# EAGLE board nfr24l_module2 (EAGLE 6.5.0)
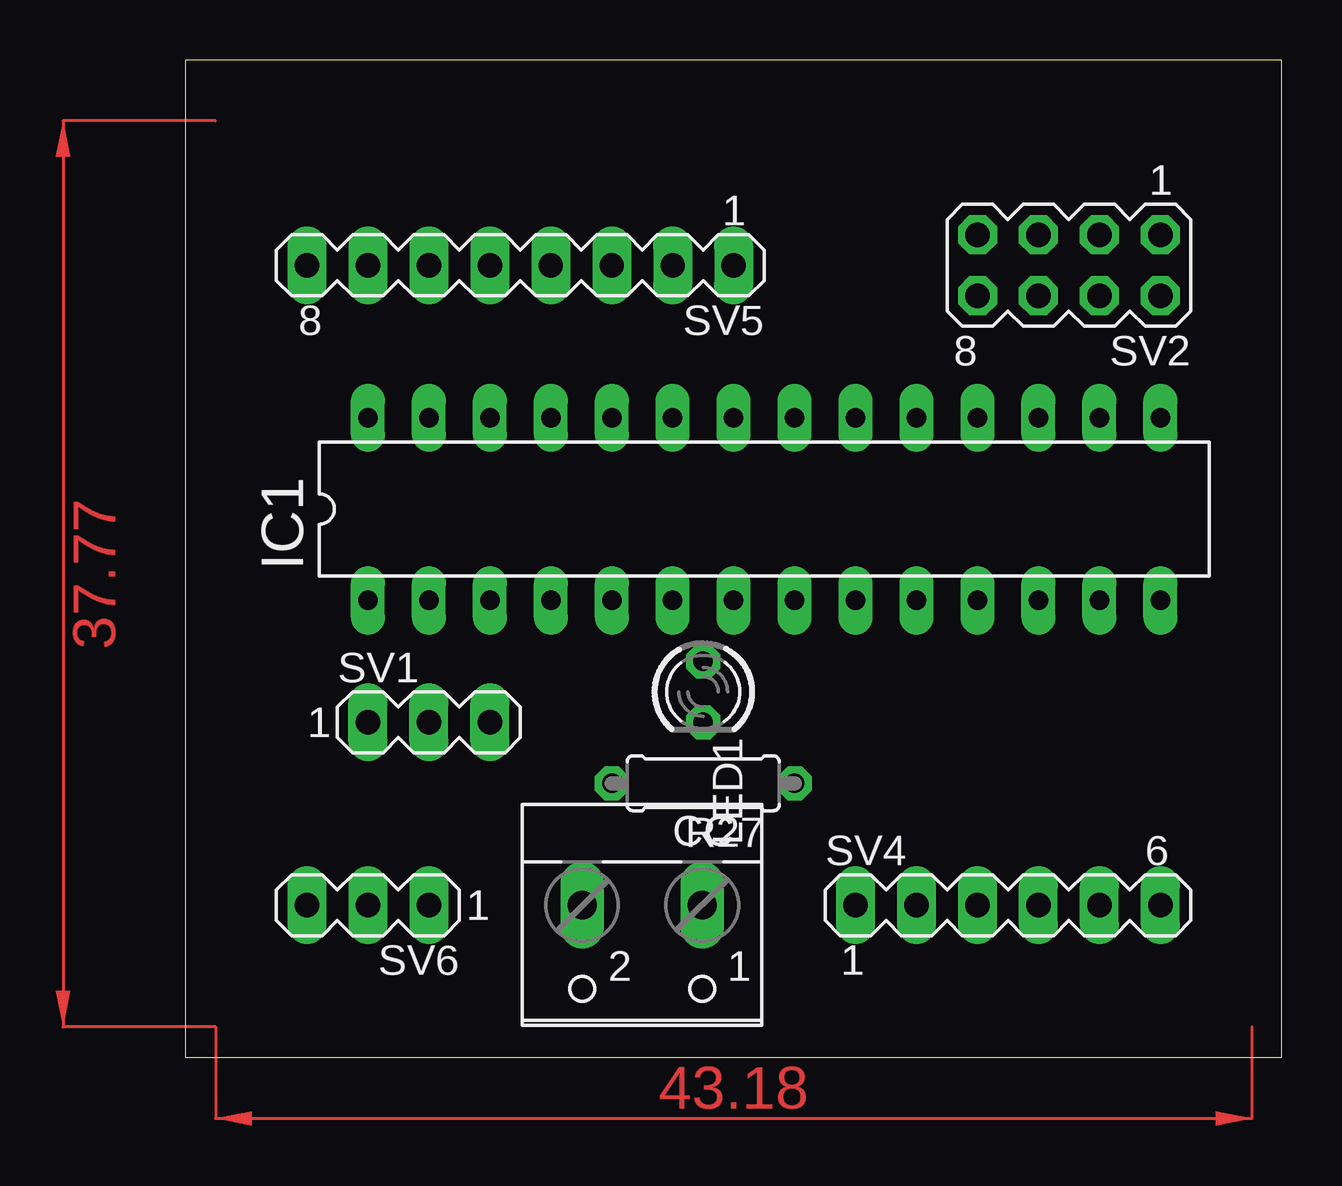
[diagram p0: board, top side]
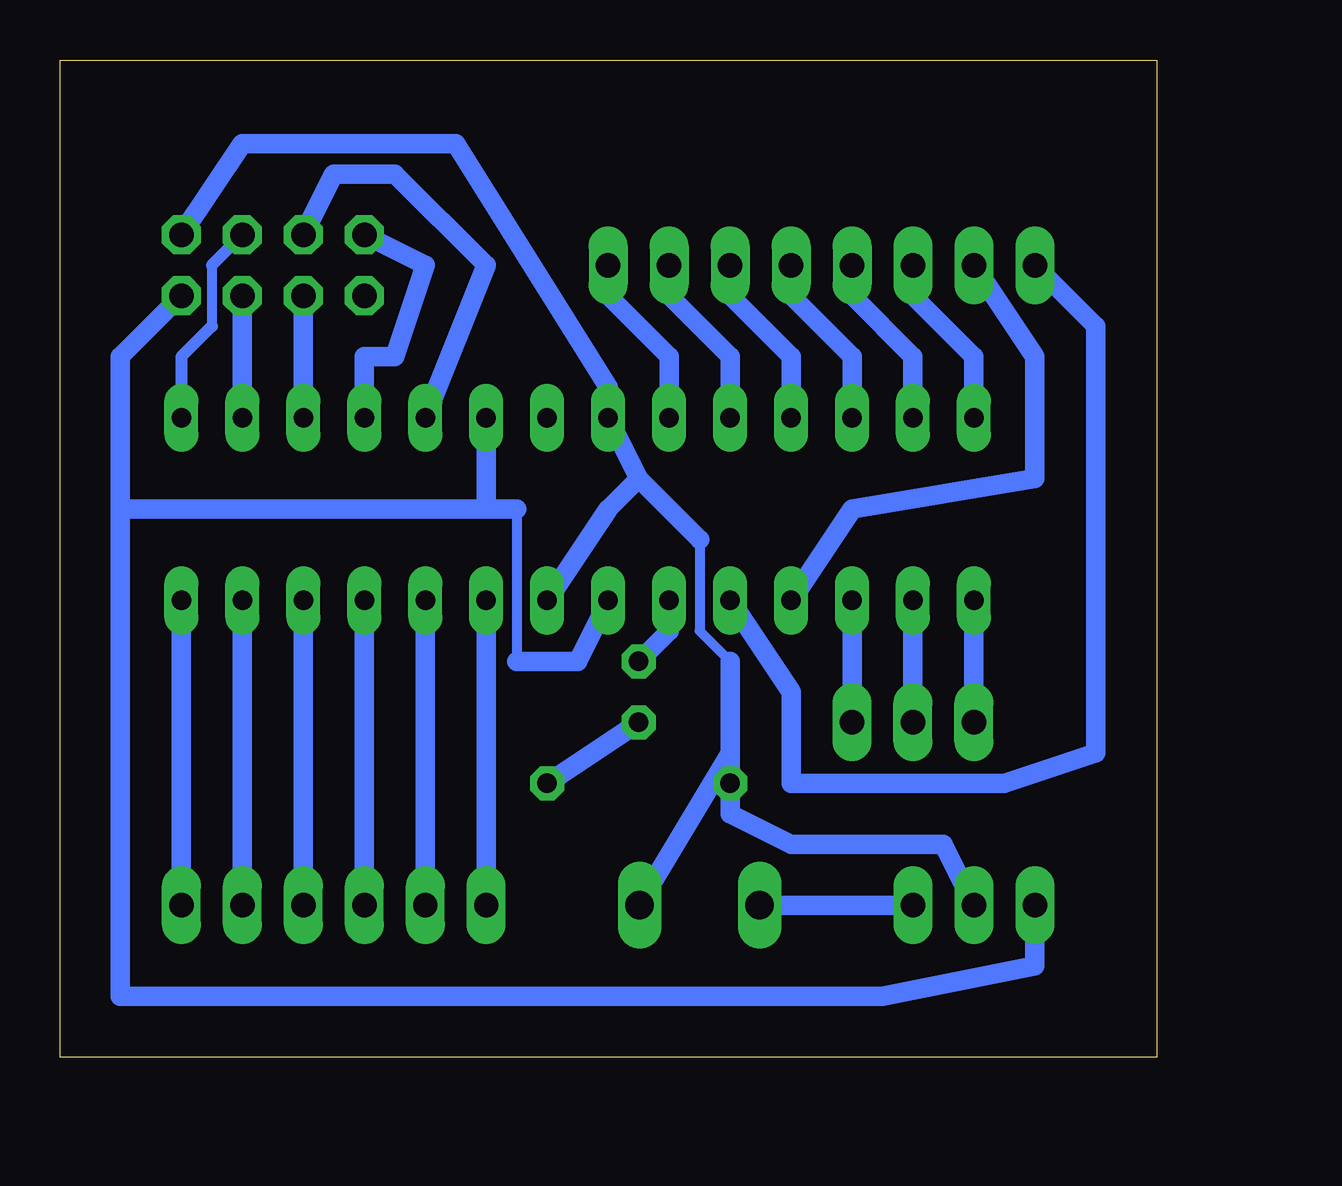
[diagram p1: board, bottom side, seen from below]

Size 45.7 x 41.58 mm. Coordinates in mm from the lower left corner, seen from the top.
Outline: 0,0 45.7,0 45.7,41.58 0,41.58 0,0
Copper layers (1*16): Top 0.035mm / dielectric 1.5mm / Bottom 0.035mm
Design rules "default *": minimum track width 20mil, minimum drill 24mil, track to track 10mil, track to pad 10mil, pad to pad 10mil, via to via 10mil, smd to smd 10mil, copper to edge 0mil, drill to drill 8mil, minimum pad ring 12mil, minimum via ring 8mil, stop-mask expansion 4mil, vias tented up to drill 0mil, thermal gap 10mil

## Footprints (pad centres in the part's own frame; a part is rotated, then mirrored left to right if it is on the bottom)
W237-102 = drill 1.194 long: 1 -2.5,-1.27; 2 2.5,-1.27
DIL28-3 = drill 0.813 long: 1 -16.51,-3.81; 2 -13.97,-3.81; 3 -11.43,-3.81; 4 -8.89,-3.81; 5 -6.35,-3.81; 6 -3.81,-3.81; 7 -1.27,-3.81; 8 1.27,-3.81; 9 3.81,-3.81; 10 6.35,-3.81; 11 8.89,-3.81; 12 11.43,-3.81; 13 13.97,-3.81; 14 16.51,-3.81; 15 16.51,3.81; 16 13.97,3.81; 17 11.43,3.81; 18 8.89,3.81; 19 6.35,3.81; 20 3.81,3.81; 21 1.27,3.81; 22 -1.27,3.81; 23 -3.81,3.81; 24 -6.35,3.81; 25 -8.89,3.81; 26 -11.43,3.81; 27 -13.97,3.81; 28 -16.51,3.81
LED3MM = drill 0.813 octagon: A -1.27,0; K 1.27,0
0207/7 = drill 0.813 octagon: 1 -3.81,0; 2 3.81,0
MA03-1 = drill 1.016 long: 1 -2.54,0; 2 0,0; 3 2.54,0
MA04-2 = drill 1.016 octagon: 1 -3.81,-1.27; 2 -3.81,1.27; 3 -1.27,-1.27; 4 -1.27,1.27; 5 1.27,-1.27; 6 1.27,1.27; 7 3.81,-1.27; 8 3.81,1.27
MA06-1 = drill 1.016 long: 1 -6.35,0; 2 -3.81,0; 3 -1.27,0; 4 1.27,0; 5 3.81,0; 6 6.35,0
MA08-1 = drill 1.016 long: 1 -8.89,0; 2 -6.35,0; 3 -3.81,0; 4 -1.27,0; 5 1.27,0; 6 3.81,0; 7 6.35,0; 8 8.89,0

## Placement (x,y rotation side)
CC  [W237-102]  19.05,5.08 180 top
IC1  ATMEGA168-PU  [DIL28-3]  24.13,22.86 0 top
LED1  [LED3MM]  21.59,15.24 270 top
R27  220  [0207/7]  21.59,11.43 180 top
SV1  [MA03-1]  10.16,13.97 0 top
SV2  [MA04-2]  36.83,33.02 180 top
SV4  [MA06-1]  34.29,6.35 0 top
SV5  [MA08-1]  13.97,33.02 180 top
SV6  [MA03-1]  7.62,6.35 180 top

## Library data of the parts
CC = con-wago-500; MPN: 237-102; OC_FARNELL: unknown; OC_NEWARK: 70K9898
IC1 = Arduino-AVR
LED1 = led
R27 = rcl
SV1 SV2 SV4-SV6 = con-lstb; OC_FARNELL: unknown; OC_NEWARK: unknown

## Nets
A0: IC1.23 SV5.1
A1: IC1.24 SV5.2
A2: IC1.25 SV5.3
A3: IC1.26 SV5.4
A4: IC1.27 SV5.5
A5: IC1.28 SV5.6
CE: IC1.15 SV2.3
CRISTAL1: IC1.9 SV4.1
CRISTAL2: IC1.10 SV4.2
CSN: IC1.16 SV2.4
D2: IC1.4 SV5.7
D3: IC1.5 SV5.8
D4: IC1.6 LED1.A
D5: IC1.11 SV4.3
D6: IC1.12 SV4.4
D7: IC1.13 SV4.5
D8: IC1.14 SV4.6
GND: CC.1 IC1.8 IC1.22 R27.2 SV2.1 SV6.2
IRQ: SV2.8
MISO: IC1.18 SV2.7
MOSI: IC1.17 SV2.6
N$7: LED1.K R27.1
RESET: IC1.1 SV1.1
RX: IC1.2 SV1.2
SCK: IC1.19 SV2.5
TX: IC1.3 SV1.3
VCC: IC1.7 IC1.20 SV2.2 SV6.3
VIN: CC.2 SV6.1

## Tracks (layer width: path | path; a pad name or v marks a point on that pad's centre or on a via)
A0
  Bottom 0.813: IC1.23 20.32,29.21 22.86,31.75 SV5.1
A1
  Bottom 0.813: IC1.24 17.78,29.21 20.32,31.75 SV5.2
A2
  Bottom 0.813: IC1.25 15.24,29.21 17.78,31.75 SV5.3
A3
  Bottom 0.813: IC1.26 12.7,29.21 15.24,31.75 SV5.4
A4
  Bottom 0.813: IC1.27 10.16,29.21 12.7,31.75 SV5.5
A5
  Bottom 0.813: IC1.28 7.62,29.21 10.16,31.75 SV5.6
CE
  Bottom 0.406: 39.37,33.02 39.37,30.48
  Bottom 0.508: IC1.15 40.64,29.21 39.37,30.48 | SV2.3 39.37,33.02
CRISTAL1
  Bottom 0.813: SV4.1 IC1.9
CRISTAL2
  Bottom 0.813: SV4.2 IC1.10
CSN
  Bottom 0.813: SV2.4 IC1.16
D2
  Bottom 0.813: IC1.4 12.7,22.86 5.08,24.13 5.08,29.21 SV5.7
D3
  Bottom 0.813: IC1.5 15.24,15.24 15.24,11.43 6.35,11.43 2.54,12.7 2.54,30.48 SV5.8
D4
  Bottom 0.813: LED1.A 20.32,17.78 IC1.6
D5
  Bottom 0.813: SV4.3 IC1.11
D6
  Bottom 0.813: SV4.4 IC1.12
D7
  Bottom 0.813: SV4.5 IC1.13
D8
  Bottom 0.813: SV4.6 IC1.14
GND
  Bottom 0.406: 17.78,16.51 19.05,17.78 19.05,21.59
  Bottom 0.508: IC1.22 22.86,27.94 | 21.59,6.35 CC.1
  Bottom 0.813: IC1.8 22.86,22.86 21.59,24.13 | IC1.22 21.59,24.13 | SV2.1 38.1,38.1 29.21,38.1 22.86,27.94 | 17.78,16.51 17.78,12.7 | 17.78,12.7 R27.2 17.78,10.16 15.24,8.89 8.89,8.89 SV6.2 | 21.59,24.13 19.05,21.59 | 17.78,12.7 21.59,6.35
MISO
  Bottom 0.813: IC1.18 33.02,29.21 31.75,29.21 30.48,33.02 SV2.7
MOSI
  Bottom 0.813: SV2.6 IC1.17
N$7
  Bottom 0.813: R27.1 LED1.K
RESET
  Bottom 0.813: SV1.1 IC1.1
RX
  Bottom 0.813: SV1.2 IC1.2
SCK
  Bottom 0.813: IC1.19 27.94,33.02 31.75,36.83 34.29,36.83 SV2.5
TX
  Bottom 0.813: SV1.3 IC1.3
VCC
  Bottom 0.406: 26.67,22.86 26.67,16.51
  Bottom 0.813: IC1.7 24.13,16.51 26.67,16.51 | SV6.3 5.08,3.81 11.43,2.54 43.18,2.54 43.18,22.86 | SV2.2 43.18,29.21 43.18,22.86 | 26.67,22.86 27.94,22.86 | 27.94,22.86 43.18,22.86 | IC1.20 27.94,22.86
VIN
  Bottom 0.813: CC.2 SV6.1
(copper drawn outside any net)
  shapes: Top area x2